# Altium PCB NEW_PCB_2021-12-20.pcbdoc
Units mm, origin at the board's own origin, x right, y up, seen from the top; angles counter-clockwise.
Board outline 37.9 x 33.09 mm, 2 copper layers (Top Layer, Bottom Layer); 1 components, 0 nets, 8 pads, 0 vias.
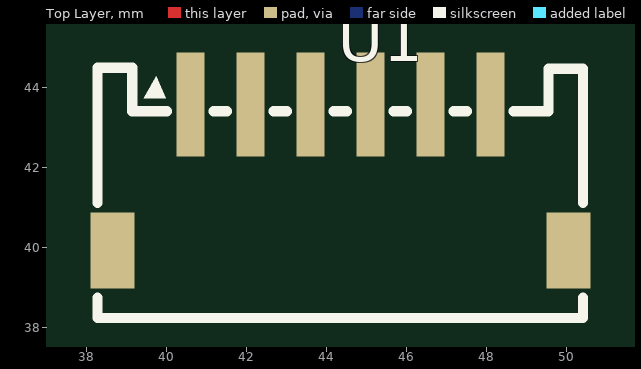
[diagram p0: Top Layer view]
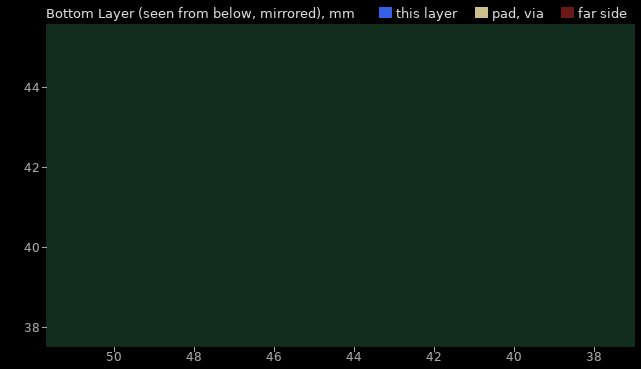
[diagram p1: Bottom Layer view, seen from below]

## Layer stack, top to bottom
Top Layer: signal copper (thickness not stored)
Dielectric: dielectric 0.32, FR-4, Dk 4.8
Bottom Layer: signal copper (thickness not stored)

## Board outline
63.3,25.4 25.4,25.4 25.4,58.494 63.3,58.494

## Components (designator, comment, footprint, x,y, rotation, side; value= is the part's Value field where it differs from the comment)
U1 "CONN-SMD_6P-P1.50_HCTL_HC-ZH-6PWT" CONN-SMD_6P-P1.50_HCTL_HC-ZH-6PWT 44.35,41.746 r0 top

## Footprints (in the part's own frame and the unit in brackets; to place one, negate y for a bottom-side part, rotate by r counter-clockwise, add the part's x,y. Pads: shape width x height; smd on the part's side, far side on the other; paste and mask are expansions set on the pad)
CONN-SMD_6P-P1.50_HCTL_HC-ZH-6PWT [mm]
  rect 0.7x2.6 smd: 1(-3.75,1.825) 2(-2.25,1.825) 3(-0.75,1.825) 4(0.75,1.825) 5(2.25,1.825) 6(3.75,1.825)
  rect 1.1x1.9 smd: 7(-5.7,-1.825) 8(5.7,-1.825)
  silkscreen extent -6.07,-3.52 6.07,2.74

## Nets (pads, with @x,y where several pads share a name; then routed paths per layer and width w, separated by ;. In a path a pad name is that pad's centre, name@x,y a point inside that pad or via, vN(x,y) a via of type N, cw(c..) or ccw(c..) an arc to the next point about the centre after c; other vN are vias at no path point)
pads on no net: U1.1 U1.2 U1.3 U1.4 U1.5 U1.6 U1.7 U1.8

## Silkscreen, mask and mechanical layers (free items; w line width, h text height)
Document:
  lines w0.003: 44.325,41.921 44.375,41.972